# Altium PCB Guitare_Electro(2).PCBDOC
Units mm, origin at the board's own origin, x right, y up, seen from the top; angles counter-clockwise.
Board outline 299.72 x 199.9 mm, 2 copper layers (Top Layer, Bottom Layer); 99 components, 79 nets, 352 pads, 45 vias.
Unrouted connection lines stored in the file: 71.
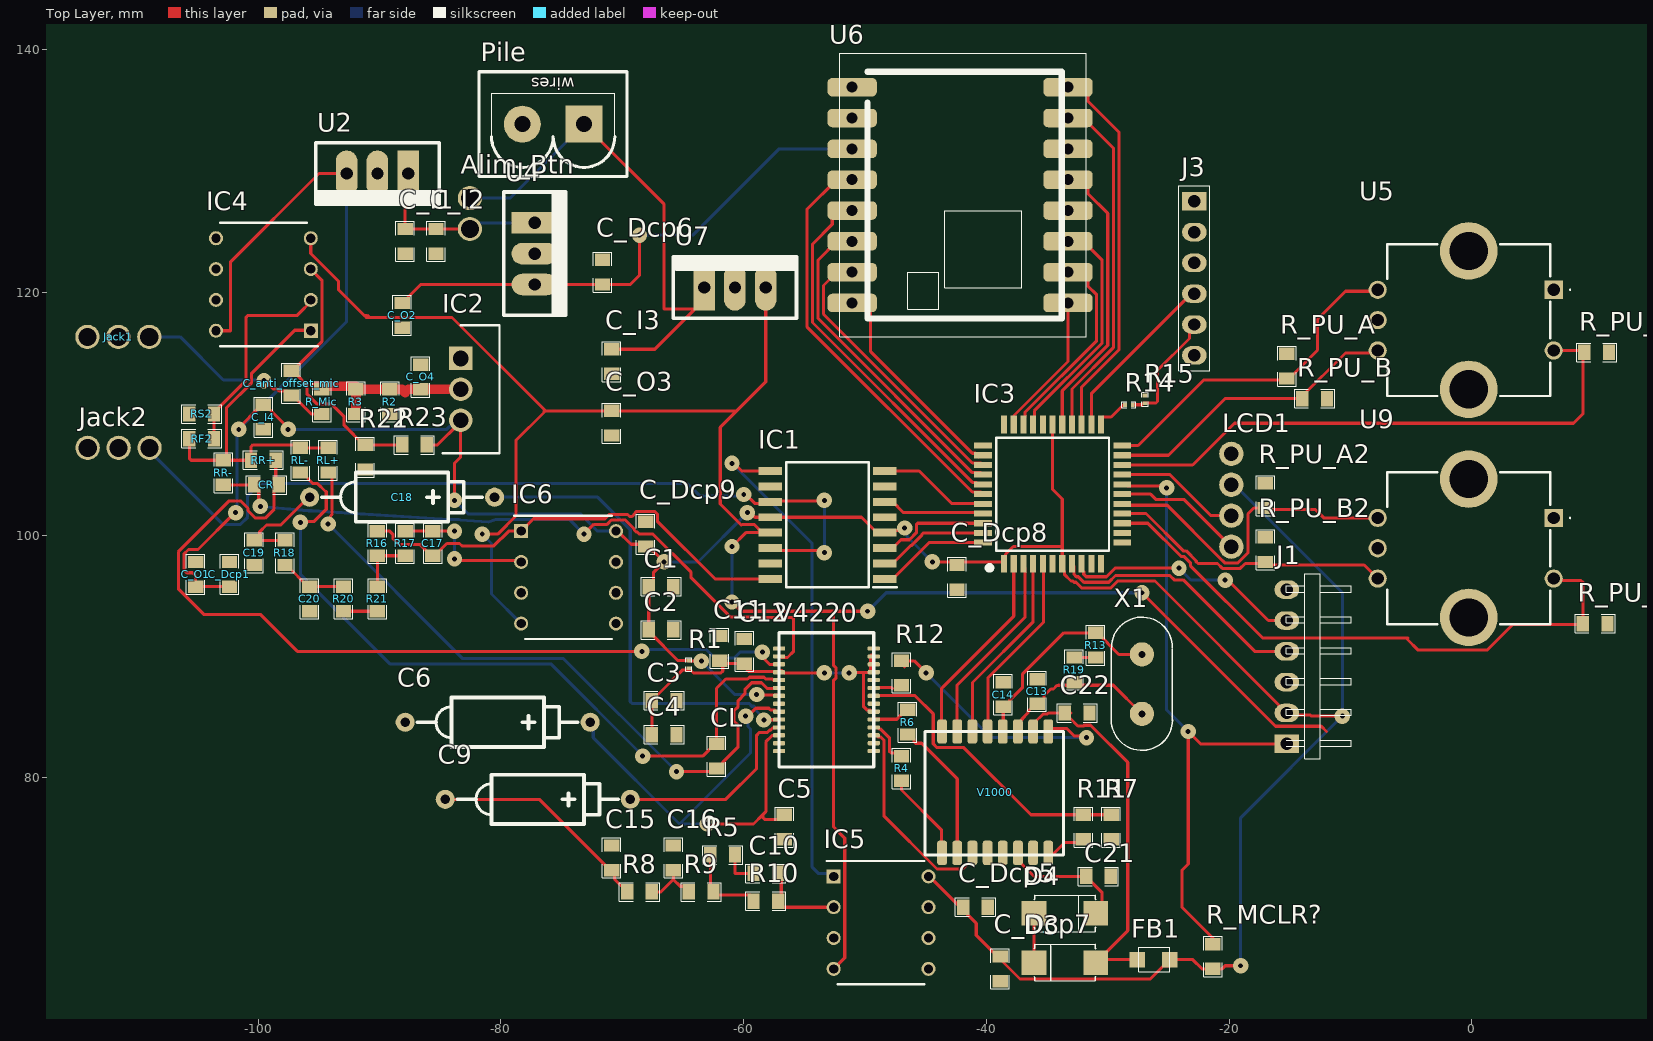
[diagram p0: Top Layer view]
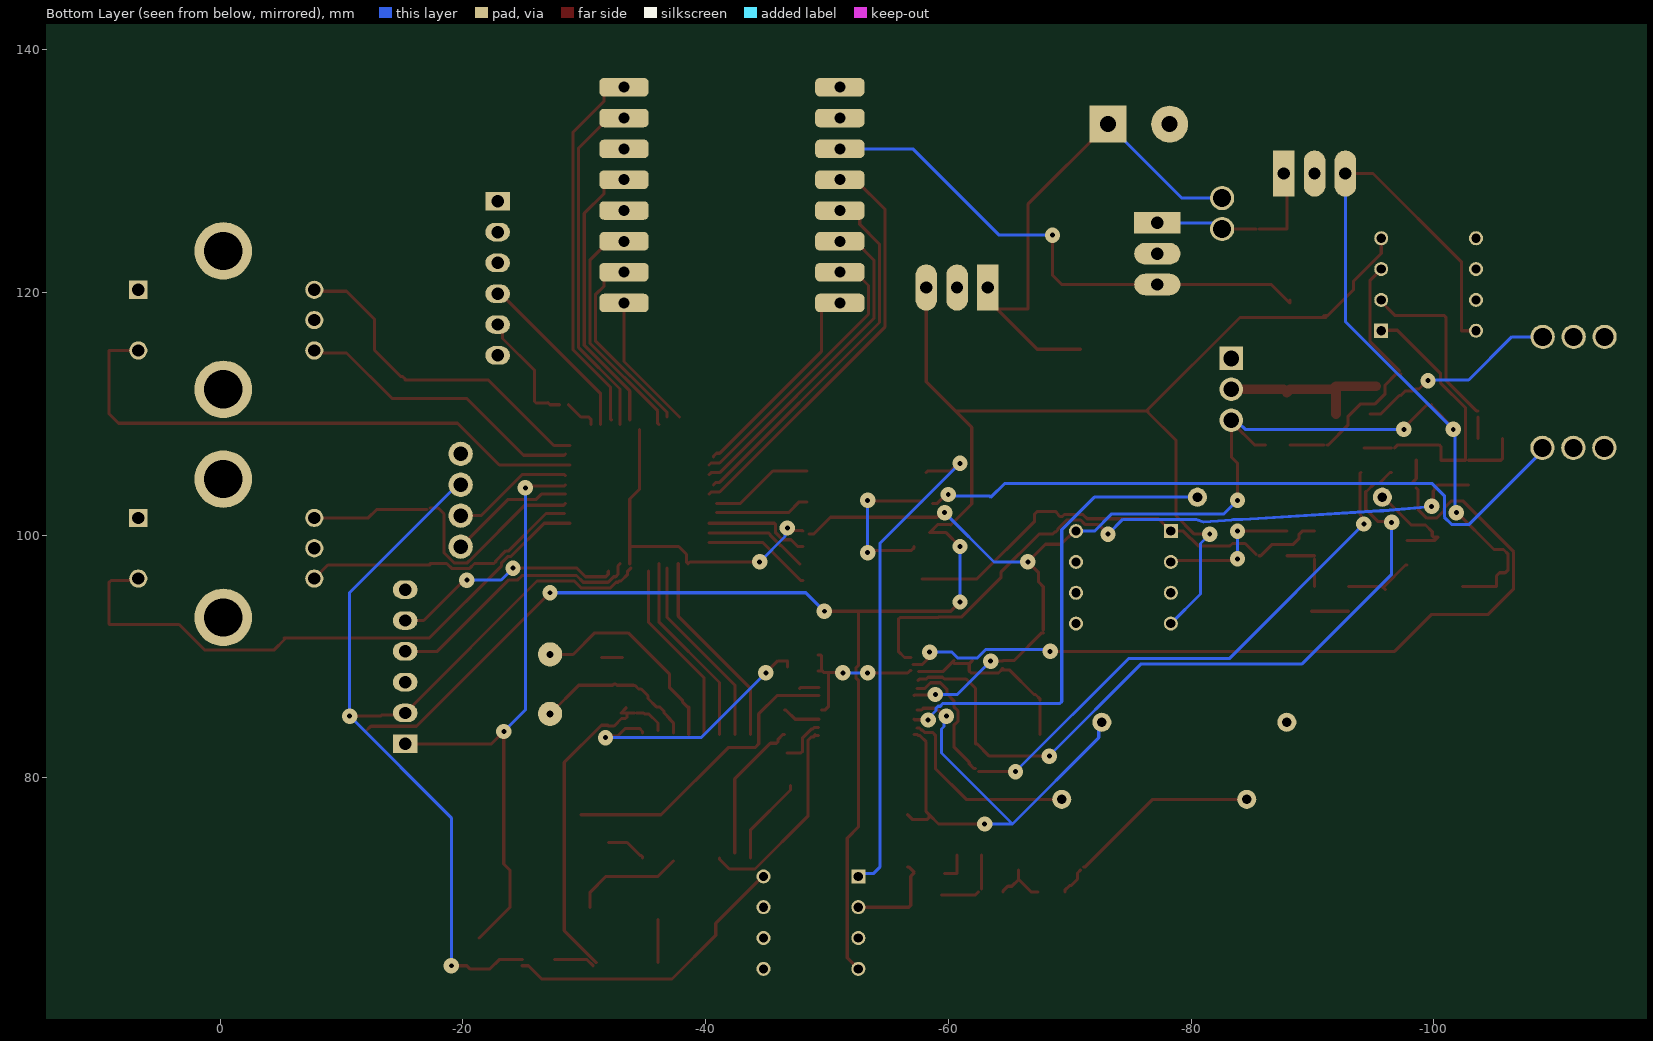
[diagram p1: Bottom Layer view, seen from below]

## Layer stack, top to bottom
Top Solder: solder mask 0.0102, Solder Resist, Dk 3.5
Top Layer: signal copper 0.0356
Dielectric1: dielectric 0.32, FR-4, Dk 4.8
Bottom Layer: signal copper 0.0356
Bottom Solder: solder mask 0.0102, Solder Resist, Dk 3.5

## Board outline
-141.655,-46.39 158.065,-46.39 158.065,153.508 -141.655,153.508

## Design rules (kind name [scope] priority, off if disabled: settings)
Clearance Clearance_7 [InNamedPolygon('Plan de masse bas')] p1: gap=1 ignorepadtopadclearanceinfootprint=FALSE except(0: Arc-Text Track-Text SMDPad-Text THPad-Text Via-Text Fill-Text Poly-Text Region-Text Text-Text)
Clearance Clearance_6 [InNamedPolygon('Plan de masse bas')] p2: gap=1 ignorepadtopadclearanceinfootprint=FALSE except(0: Arc-Text Track-Text SMDPad-Text THPad-Text Via-Text Fill-Text Poly-Text Region-Text Text-Text)
Clearance 1 [InNamedPolygon('Plan de masse bas')] p3: gap=1 ignorepadtopadclearanceinfootprint=FALSE except(0: Arc-Text Track-Text SMDPad-Text THPad-Text Via-Text Fill-Text Poly-Text Region-Text Text-Text)
Clearance Clearance_5 [InNamedPolygon('Plan de masse bas')] p4: gap=1 ignorepadtopadclearanceinfootprint=FALSE except(0: Arc-Text Track-Text SMDPad-Text THPad-Text Via-Text Fill-Text Poly-Text Region-Text Text-Text)
Clearance Clearance_4 [InNamedPolygon('Plan de masse bas')] p5: gap=0.5 ignorepadtopadclearanceinfootprint=FALSE except(0: Arc-Text Track-Text SMDPad-Text THPad-Text Via-Text Fill-Text Poly-Text Region-Text Text-Text)
Clearance Clearance_3 [InNamedPolygon('Plan de masse bas')] p6: gap=0.5 ignorepadtopadclearanceinfootprint=FALSE
Clearance .5 [InNamedPolygon('Plan de masse bas')] p7: gap=0.5 ignorepadtopadclearanceinfootprint=FALSE
Clearance Clearance_2 [InNamedPolygon('Plan de masse bas')] p8: gap=0.5 ignorepadtopadclearanceinfootprint=FALSE except(0: Arc-Text Track-Text SMDPad-Text THPad-Text Via-Text Fill-Text Poly-Text Region-Text Text-Text)
Clearance Clearance_1 [InNamedPolygon('Plan de masse bas')] p9: gap=0.5 ignorepadtopadclearanceinfootprint=FALSE except(0: Arc-Text Track-Text SMDPad-Text THPad-Text Via-Text Fill-Text Poly-Text Region-Text Text-Text)
Clearance [InNamedPolygon('Plan de masse bas')] p10: gap=0.254 ignorepadtopadclearanceinfootprint=FALSE except(0: Arc-Text Track-Text)
Clearance Clearance_bottom_polygon [OnLayer('Bottom Layer') Or OnLayer('Multi-Layer') vs OnLayer('Bottom Layer')  And  InPoly] p11: gap=0.508 ignorepadtopadclearanceinfootprint=FALSE except(0: Arc-Hole Track-Hole SMDPad-Hole THPad-Hole Via-Hole Fill-Hole Poly-Hole Region-Hole Text-Hole)
Clearance Clearance_bottom_polygon_keepout [OnLayer('Bottom Layer') Or OnLayer('Multi-Layer') Or InPoly vs OnLayer('Keepout')] p12: gap=0 ignorepadtopadclearanceinfootprint=FALSE
Clearance Clearance_top_polygon [OnLayer('Top Layer')  Or OnLayer('Multi-Layer') vs OnLayer('Top Layer') And InPoly] p13: gap=0.508 ignorepadtopadclearanceinfootprint=FALSE except(0: Arc-Hole Track-Hole SMDPad-Hole THPad-Hole Via-Hole Fill-Hole Poly-Hole Region-Hole Text-Hole)
Clearance Clearance_bottom [OnLayer('Bottom Layer') Or OnLayer('Multi-Layer') vs OnLayer('Bottom Layer')  And Not InPoly] p14: gap=0.203 ignorepadtopadclearanceinfootprint=FALSE except(0: Arc-Hole Track-Hole SMDPad-Hole THPad-Hole Via-Hole Fill-Hole Poly-Hole Region-Hole Text-Hole)
Clearance Clearance_top [OnLayer('Top Layer')  Or OnLayer('Multi-Layer') vs OnLayer('Top Layer') And Not InPoly] p15: gap=0.203 ignorepadtopadclearanceinfootprint=FALSE except(0: Arc-Hole Track-Hole SMDPad-Hole THPad-Hole Via-Hole Fill-Hole Poly-Hole Region-Hole Text-Hole)
Clearance Clearance_pad_to_pad [OnLayer('Multi-Layer') vs OnLayer('Multi-Layer')] p16: gap=0.254 ignorepadtopadclearanceinfootprint=FALSE except(0: Arc-Hole Track-Hole SMDPad-Hole THPad-Hole Via-Hole Fill-Hole Poly-Hole Region-Hole Text-Hole)
ComponentClearance ComponentClearance_bottom [OnLayer('Bottom Overlay') vs OnLayer('Bottom Overlay')] p1: gap=0 collisioncheckmode=3 verticalgap=0.254 showdistances=FALSE
ComponentClearance ComponentClearance_top [OnLayer('Top Overlay') vs OnLayer('Top Overlay')] p2: gap=0 collisioncheckmode=3 verticalgap=0.254 showdistances=FALSE
FabricationTestPointUsage TestPointUsage [All] p1: valid=0 allowmultiple=FALSE
FabricationTestpoint Testpoint [All] p1: side=3 testpointundercomponent=TRUE minsize=1.016 maxsize=2.54 preferedsize=1.524 minholesize=0 maxholesize=1.016 preferedholesize=0.813 testpointgrid=0.025 allowsidetop=TRUE allowsidebottom=TRUE usegrid=TRUE gridtolerance=0
HoleSize [All] p1: absolutevalues=TRUE maxlimit=25.4 minlimit=0.406 maxpercent=80.000 minpercent=20.000
MinimumAnnularRing [PadXSize_AllLayers = PadYSize_AllLayers] p1: minimumring=0.254
PermittedLayers [All] p1: toplayerpermitted=TRUE bottomlayerpermitted=TRUE
PolygonConnect [All] p1: connectstyle=Relief reliefconductorwidth=0.61 reliefentries=4 polygonreliefangle="90 Angle" airgapwidth=0.254
RoutingVias [All] p1: holewidth=0.406 width=1.27 viastyle="Through Hole" minholewidth=0.406 minwidth=0.914 maxholewidth=25.4 maxwidth=25.4
SMDToPlane [All] p1: distance=0
SolderMaskExpansion [All] p1: expansion=0.102 istentingtop=FALSE
SupplyNets "Schematic Supply Nets_1" [InNet('GND')] p1: voltage=0.000
ViasUnderSMD [All] p1: allowed=FALSE
Width Width_botom_top [OnLayer('Bottom Layer') or OnLayer('Top Layer')] p1: maxlimit=254 minlimit=0.254 preferedwidth=0.813
26 further rules are at their usual default settings.

## Components (designator, comment, footprint, x,y, rotation, side; value= is the part's Value field where it differs from the comment)
Alim_Btn "On/Off" On/Off -82.55,127.772 r270 top
C1 "CAP" 0805 -67.818,95.758 r0 top value=100n
C2 "CAP" 0805 -67.818,92.202 r0 top value=100n
C3 "CAP" 0805 -67.564,86.36 r0 top value=100n
C4 "CAP" 0805 -67.564,83.566 r0 top value=100n
C5 "CAP" 0805 -56.642,76.962 r270 top value=100n
C6 "CAP_POL" POLAR0.6 -72.644,84.582 r0 top value=1u
C9 "CAP_POL" POLAR0.6 -69.342,78.232 r0 top value=1u
C10 "CAP" 0805 -57.15,72.136 r180 top value=100n
C11 "CAP" 0805 -61.976,89.662 r90 top value=100n
C12 "CAP" 0805 -59.944,89.408 r90 top value=100n
C13 "CAP" 0805 -35.814,86.106 r90 top value=100n
C14 "CAP" 0805 -38.608,85.852 r90 top value=100n
C15 "CAP" 0805 -70.866,72.39 r90 top value=100n
C16 "CAP" 0805 -65.786,72.39 r90 top value=100n
C17 "CAP" 0805 -85.598,100.33 r270 top value=100n
C18 "CAP_POL" POLAR0.6 -80.518,103.124 r0 top value=1u
C19 "CAP" 0805 -100.33,99.568 r270 top value=100n
C20 "CAP" 0805 -95.758,95.758 r270 top value=100n
C21 "CAP" 0805 -31.78,71.882 r0 top value=100n
C22 "CAP" 0805 -31.496,85.344 r180 top value=100n
C_anti_offset_mic "CAP" 0805 -97.282,111.506 r90 top value=100n
C_Dcp1 "CAP" 0805 -102.362,95.758 r90 top value=100n
C_Dcp5 "CAP" 0805 -41.91,69.342 r0 top value=100n
C_Dcp6 "CAP" 0805 -71.628,120.65 r90 top value=100n
C_Dcp7 "CAP" 0805 -38.862,65.278 r270 top value=100n
C_Dcp8 "CAP" 0805 -42.418,97.536 r270 top value=100n
C_Dcp9 "CAP" 0805 -68.072,99.06 r90 top value=100n
C_I1 "CAP" 0805 -87.884,123.19 r90 top value=100n
C_I2 "CAP" 0805 -85.344,123.19 r90 top value=100n
C_I3 "CAP" 0805 -70.866,115.316 r270 top value=100n
C_I4 "CAP" 0805 -99.568,110.744 r270 top value=100n
C_O1 "CAP" 0805 -105.156,95.758 r90 top value=100n
C_O2 "CAP" 0805 -88.138,117.094 r90 top value=100n
C_O3 "CAP" 0805 -70.866,110.236 r270 top value=100n
C_O4 "CAP" 0805 -86.614,112.014 r90 top value=100n
CL "CAP" 0805 -62.23,80.772 r90 top value=100n
CR "CAP" 0805 -98.298,104.14 r180 top value=100n
D3 "comment" SMA -30.988,64.77 r180 top
D4 "comment" SMA -36.068,68.834 r0 top
FB1 "FERRITE BEAD" inductorFC -24.892,65.024 r180 top
IC1 "PGA2311U" SOIC127P1030X265-16N -53.086,100.838 r180 top
IC2 "LM350T" TO254P470X1028X1955-3P -83.312,114.554 r270 top
IC3 "PIC18F45Q24-E_PT" QFP80P1200X1200X120-44N -34.544,103.378 r90 top
IC4 "MCP6272-E_P" DIP781W56P254L950H533Q8N -99.568,120.65 r180 top
IC5 "MCP6272-E_P" DIP781W56P254L950H533Q8N -48.673,68.072 r0 top
IC6 "MCP6272-E_P" DIP781W56P254L950H533Q8N -74.422,96.52 r0 top
J1 "PIC-ICSP" PIC-ICSP -15.24,82.804 r0 top
J3 "comment" HEADER6-100-1x6 -22.86,127.508 r0 top
Jack1 "Jack 6.35" Jack -108.966,116.332 r270 top
Jack2 "Jack 6.35" Jack -108.946,107.188 r270 top
LCD1 "LCD" LCD -19.812,99.05 r180 top
Pile "comment" AMP_2 -73.152,133.858 r180 top
R1 "RES" 0201 -64.516,89.662 r270 top value=1K
R2 "RES" 0805 -89.154,112.014 r270 top value=1K
R3 "RES" 0805 -91.948,109.982 r90 top value=1K
R4 "RES" 0805 -46.99,79.756 r90 top value=1K
R5 "RES" 0805 -62.738,73.66 r0 top value=1K
R6 "RES" 0805 -46.482,83.566 r90 top value=1K
R7 "RES" 0805 -29.718,76.962 r270 top value=1K
R8 "RES" 0805 -69.596,70.612 r0 top value=1K
R9 "RES" 0805 -64.516,70.612 r0 top value=1K
R10 "RES" 0805 -59.182,69.85 r0 top value=1K
R11 "RES" 0805 -32.004,74.93 r90 top value=1K
R12 "RES" 0805 -46.99,89.662 r270 top value=1K
R13 "RES" 0805 -30.988,89.916 r90 top value=1K
R14 "RES" 0201 -27.94,110.744 r180 top value=1K
R15 "RES" 0201 -26.924,110.871 r90 top value=1K
R16 "RES" 0805 -90.17,98.298 r90 top value=1K
R17 "RES" 0805 -87.884,98.298 r90 top value=1K
R18 "RES" 0805 -97.79,99.568 r270 top value=1K
R19 "RES" 0805 -32.766,87.884 r90 top value=1K
R20 "RES" 0805 -92.964,95.758 r270 top value=1K
R21 "RES" 0805 -90.17,93.726 r90 top value=1K
R22 "RES" 0805 -91.186,107.442 r270 top value=4.7K
R23 "RES" 0805 -86.106,107.442 r180 top value=4.7K
R_MCLR? "RES" 0805 -21.336,66.294 r270 top value=1K (schematic designator R_MCLR1)
R_Mic "RES" 0805 -94.742,112.014 r270 top value=1K
R_PU_A "RES" 0805 -15.24,112.903 r90 top value=1K
R_PU_A2 "RES" 0805 -17.018,102.235 r90 top value=1K
R_PU_B "RES" 0805 -13.97,111.252 r0 top value=1K
R_PU_B2 "RES" 0805 -17.018,97.79 r90 top value=1K
R_PU_NO "RES" 0805 9.271,115.062 r0 top value=1K
R_PU_NO2 "RES" 0805 9.144,92.71 r0 top value=1K
RF2 "RES" 0805 -103.632,107.95 r180 top value=1K
RL+ "RES" 0805 -94.234,105.156 r90 top value=1K
RL- "RES" 0805 -96.52,105.156 r90 top value=1K
RR+ "RES" 0805 -98.552,106.172 r180 top value=1K
RR- "RES" 0805 -102.87,104.14 r90 top value=1K
RS2 "RES" 0805 -103.632,109.982 r180 top value=1K
U2 "78xx" TO220V -87.63,129.794 r180 top
U4 "78xx" TO220V -77.216,125.73 r270 top
U5 "PEC11R-4215F-S0024" PEC11R4215FS0024 6.746,120.214 r270 top
U6 "RF-LORA-868-SO" RF-LORA-868-DIP -51.054,136.906 r0 top
U7 "78xx" TO220V -63.256,120.401 r0 top
U9 "PEC11R-4215F-S0024" PEC11R4215FS0024 6.746,101.418 r270 top
V1000 "V1000" V1000 -34.898,83.82 r270 top
V4220 "V4220" V4220 -49.276,82.206 r180 top
X1 "10.000MHz" HC-49S -27.178,85.27 r90 top

## Footprints (in the part's own frame and the unit in brackets; to place one, negate y for a bottom-side part, rotate by r counter-clockwise, add the part's x,y. Pads: shape width x height; smd on the part's side, far side on the other; paste and mask are expansions set on the pad)
0201 [mil]
  rect 12x16 smd: 1(0,0) 2(25,0)
  silkscreen extent -10,-10 35,10
0805 [mil]
  rect 40x50 smd: 1(0,0) 2(80,0)
  silkscreen extent -25,-30 105,30
AMP_2 [mil]
  rect 120x120 hole 52: 1(0,0)
  round 120 hole 52: 2(200,0)
  silkscreen extent -140,-170 340,170
DIP781W56P254L950H533Q8N [mm]
  rect 1.158x1.158 hole 0.758: 1(-3.905,3.81)
  round 1.158 hole 0.758: 2(-3.905,1.27) 3(-3.905,-1.27) 4(-3.905,-3.81) 5(3.905,-3.81) 6(3.905,-1.27) 7(3.905,1.27) 8(3.905,3.81)
  silkscreen extent -4.48,-5.08 3.56,5.08, body extent -4.04,-4.75 4.04,4.75, height 5.33
HC-49S [mm]
  round 2 hole 0.6: 1(0,0) 2(4.9,0)
  silkscreen extent -3,-2.52 7.97,2.52
HEADER6-100-1x6 [mil]
  rect 80x60 hole 40: 1(0,0)
  oval 80x60 hole 40: 2(0,-100) 3(0,-200) 4(0,-300) 5(0,-400) 6(0,-500)
  silkscreen extent -50,-550 50,50
inductorFC [mil]
  rect 50x50 smd: 1(0,0) 2(105,0)
  silkscreen extent 0,-40 100,40
Jack [mm]
  round 2 hole 1.5 paste-2539.97 mask+0: 1(0,0) 2(0,-2.55) 3(0,-5.1)
LCD [mm]
  round 2 hole 1.2 paste-2539.97 mask+0: 1(0,0) 2(0,-2.55) 3(0,-5.1) 4(0,-7.65)
On/Off [mm]
  round 2 hole 1.5 paste-2539.97 mask+0: 1(0,0) 2(2.55,0)
PEC11R4215FS0024 [mm]
  rect 1.5x1.5 hole 1: 1(0,0)
  round 1.5 hole 1: 2(5,0) A1(0,-14.5) B1(5,-14.5) C1(2.5,-14.5)
  round 4.74 hole 3.16: MH1(-3.2,-7) MH2(8.2,-7)
  silkscreen extent -3.75,-13.7 8.75,1.4, body extent -4.4,-15.39 9.4,-0.47, height 21.48
PIC-ICSP [mil]
  rect 80x60 hole 40: 1(0,0)
  oval 80x60 hole 40: 2(0,100) 3(0,200) 4(0,300) 5(0,400) 6(0,500)
  silkscreen extent -2,-48 208,552
POLAR0.6 [mil]
  round 62 hole 31.5: 1(0,0) 2(-600,0)
  silkscreen extent -560,-80 -40,80
QFP80P1200X1200X120-44N [mm]
  rect 1.475x0.5 smd: 1(-5.738,4) 2(-5.738,3.2) 3(-5.738,2.4) 4(-5.738,1.6) 5(-5.738,0.8) 6(-5.738,0) 7(-5.738,-0.8) 8(-5.738,-1.6) 9(-5.738,-2.4) 10(-5.738,-3.2) 11(-5.738,-4) 23(5.738,-4) 24(5.738,-3.2) 25(5.738,-2.4) 26(5.738,-1.6) 27(5.738,-0.8) 28(5.738,0) 29(5.738,0.8) 30(5.738,1.6) 31(5.738,2.4) 32(5.738,3.2) 33(5.738,4)
  rect 0.5x1.475 smd: 12(-4,-5.738) 13(-3.2,-5.738) 14(-2.4,-5.738) 15(-1.6,-5.738) 16(-0.8,-5.738) 17(0,-5.738) 18(0.8,-5.738) 19(1.6,-5.738) 20(2.4,-5.738) 21(3.2,-5.738) 22(4,-5.738) 34(4,5.738) 35(3.2,5.738) 36(2.4,5.738) 37(1.6,5.738) 38(0.8,5.738) 39(0,5.738) 40(-0.8,5.738) 41(-1.6,5.738) 42(-2.4,5.738) 43(-3.2,5.738) 44(-4,5.738)
  silkscreen extent -6.27,-4.65 4.65,5.4, body extent -6,-6 6,6, height 1.2
RF-LORA-868-DIP [mil]
  rrect50% 160x60 hole 36: 1(0,0) 2(0,-100) 3(0,-200) 4(0,-300) 5(0,-400) 6(0,-500) 7(0,-600) 8(0,-700) 9(700,-700) 10(700,-600) 11(700,-500) 12(700,-400) 13(700,-300) 14(700,-200) 15(700,-100) 16(700,0)
  silkscreen extent -40,-810 760,110
SMA [mil]
  rect 80x80 smd: 1(0,0) 2(200,0)
  silkscreen extent 0,-59 200,59
SOIC127P1030X265-16N [mm]
  rect 1.95x0.65 smd: 1(-4.725,4.445) 2(-4.725,3.175) 3(-4.725,1.905) 4(-4.725,0.635) 5(-4.725,-0.635) 6(-4.725,-1.905) 7(-4.725,-3.175) 8(-4.725,-4.445) 9(4.725,-4.445) 10(4.725,-3.175) 11(4.725,-1.905) 12(4.725,-0.635) 13(4.725,0.635) 14(4.725,1.905) 15(4.725,3.175) 16(4.725,4.445)
  silkscreen extent -5.7,-5.15 3.4,5.15, body extent -5.17,-5.15 5.17,5.15, height 2.59
TO220V [mil]
  rect 70x150 hole 40: 1(0,0)
  oval 70x150 hole 40: 2(100,0) 3(200,0)
  silkscreen extent -100,-100 300,100
TO254P470X1028X1955-3P [mm]
  rect 1.935x1.935 hole 1.29: 1(0,0)
  round 1.935 hole 1.29: 2(2.54,0) 3(5.08,0)
  silkscreen extent -2.73,-1.5 7.81,3.2, body extent -2.54,-1.77 7.62,2.8, height 19.69
V1000 [mm] "Footprint du V1000"
  rrect50% 2x0.8 smd paste-2539.97 mask+0.05: 1(0,0) 2(0,-1.25) 3(0,-2.5) 4(0,-3.75) 5(0,-5) 6(0,-6.25) 7(0,-7.5) 8(0,-8.75) 9(10,0) 10(10,-1.25) 11(10,-2.5) 12(10,-3.75) 13(10,-5) 14(10,-6.25) 15(10,-7.5) 16(10,-8.75)
  silkscreen extent 0,-10.16 10.16,1.27
V4220 [mm] "Footprint du 4220"
  rrect50% 1x0.35 smd paste-2539.97 mask+0.05: 1(0,0) 2(0,-0.65) 3(0,-1.3) 4(0,-1.95) 5(0,-2.6) 6(0,-3.25) 7(0,-3.9) 8(0,-4.55) 9(0,-5.2) 10(0,-5.85) 11(0,-6.5) 12(0,-7.15) 13(0,-7.8) 14(0,-8.45) 15(7.8,-8.45) 16(7.8,-7.8) 17(7.8,-7.15) 18(7.8,-6.5) 19(7.8,-5.85) 20(7.8,-5.2) 21(7.8,-4.55) 22(7.8,-3.9) 23(7.8,-3.25) 24(7.8,-2.6) 25(7.8,-1.95) 26(7.8,-1.3) 27(7.8,-0.65) 28(7.8,0)
  silkscreen extent 0,-9.75 7.8,1.3

## Part data
C1 C2 C3 C4 C5 C10 C11 C12 C13 C14 C15 C16 C17 C19 C20 C21 C22 C_anti_offset_mic C_Dcp1 C_Dcp5 C_Dcp6 C_Dcp7 C_Dcp8 C_Dcp9 C_I1 C_I2 C_I3 C_I4 C_O1 C_O2 C_O3 C_O4 CL CR: "capacité non polarisée"
C6 C9 C18: "capacité polarisée"
D3 D4: library part DIODE, "diode usage général"
FB1: "perle ferrite"
IC1: "Integrated Circuit", Manufacturer_Name="Texas Instruments", Mouser Part Number=595-PGA2311U, Arrow Part Number=PGA2311U, Arrow Price/Stock=https://www.arrow.com/en/products/pga2311u/texas-instruments?region=nac, Datasheet Link=http://www.ti.com/lit/ds/symlink/pga2311.pdf, Height=2.65mm, Manufacturer_Part_Number=PGA2311U, Mouser Price/Stock=https://www.mouser.co.uk/ProductDetail/Texas-Instruments/PGA2311U?qs=68g8TF7PocLi9xd7ruCsyA%3D%3D
IC2: "Integrated Circuit", Manufacturer_Name="Texas Instruments", Mouser Part Number=926-LM350T, Arrow Part Number=LM350T, Arrow Price/Stock=https://www.arrow.com/en/products/lm350t/texas-instruments?region=nac, Datasheet Link=https://www.ti.com/general/docs/suppproductinfo.tsp?distId=26&gotoUrl=http%253A%252F%252Fwww.ti.com%252Flit%252Fgpn%252Flm350-n, Height=4.7mm, Manufacturer_Part_Number=LM350T, Mouser Price/Stock=https://www.mouser.co.uk/ProductDetail/Texas-Instruments/LM350T?qs=QbsRYf82W3ET2g8%2FVkuXIw%3D%3D
IC3: "Integrated Circuit", Manufacturer_Name=Microchip, Manufacturer_Part_Number=PIC18F45Q24-E/PT, Mouser Part Number=579-PIC18F45Q24EPT, Datasheet Link=https://www.mouser.it/datasheet/2/268/PIC18F26_45_46_55_56Q24_Microcontroller_Data_Sheet-3323954.pdf, Height=1.2mm, Mouser Price/Stock=https://www.mouser.co.uk/ProductDetail/Microchip-Technology/PIC18F45Q24-E-PT?qs=ST9lo4GX8V32RoCEzTJhlQ%3D%3D
IC4 IC5 IC6: "Integrated Circuit", Arrow Part Number=MCP6272-E/P, Manufacturer_Name=Microchip, Mouser Part Number=579-MCP6272-E/P, Arrow Price/Stock=https://www.arrow.com/en/products/mcp6272-ep/microchip-technology, Datasheet Link=https://datasheet.datasheetarchive.com/originals/distributors/SFDatasheet-4/sf-00090096.pdf, Height=5.334mm, Manufacturer_Part_Number=MCP6272-E/P, Mouser Price/Stock=https://www.mouser.com/Search/Refine.aspx?Keyword=579-MCP6272-E%2FP
J3: library part HEADER6
Pile: library part POWER2, "connecteur alim 2 pôles"
R1 R2 R3 R4 R5 R6 R7 R8 R9 R10 R11 R12 R13 R14 R15 R16 R17 R18 R19 R20 R21 R22 R23 R_MCLR? R_Mic R_PU_A R_PU_A2 R_PU_B R_PU_B2 R_PU_NO R_PU_NO2 RF2 RL+ RL- RR+ RR- RS2: "resistance"
U2 U4 U7: library part REG_POS, "régulateur positif fixe"
U5 U9: "Undefined or Miscellaneous", Manufacturer_Name=Bourns, Mouser Part Number=652-PEC11R-4215F-S24, Arrow Part Number=PEC11R-4215F-S0024, Arrow Price/Stock=https://www.arrow.com/en/products/pec11r-4215f-s0024/bourns?region=nac, Datasheet Link=https://www.bourns.com/docs/product-datasheets/pec11r.pdf?sfvrsn=bb617cbf_12, Height=21.5mm, Manufacturer_Part_Number=PEC11R-4215F-S0024, Mouser Price/Stock=https://www.mouser.co.uk/ProductDetail/Bourns/PEC11R-4215F-S0024?qs=Zq5ylnUbLm5lAqmKF80wzQ%3D%3D
X1: library part XTAL, "Quartz", Manufacturer="Generic Components", Class I=Oscillator, Class II="Crystal Oscillator", Published=8-Jun-2000, Publisher="Altium Limited", Revision="July-2002: Re-released for DXP Platform."

## Via types
v1: diameter 1.27, hole 0.406, Top Layer to Bottom Layer, 44 vias
v2: diameter 0.051, hole 0.036, Top Layer to Bottom Layer, 1 vias

## Nets (pads, with @x,y where several pads share a name; then routed paths per layer and width w, separated by ;. In a path a pad name is that pad's centre, name@x,y a point inside that pad or via, vN(x,y) a via of type N, cw(c..) or ccw(c..) an arc to the next point about the centre after c; other vN are vias at no path point)
_MCLR: IC3.18 J1.1 R_MCLR?.1 | length 51
  Top Layer w0.254: IC3.18@-28.448,104.14 -28.363,104.055 -25.315,104.055 v1(-25.146,103.886) ; -21.336,66.802 -23.876,69.342 -23.876,72.39 -23.368,72.898 v1(-23.368,83.82) -22.352,82.804 J1.1
  Bottom Layer w0.254: v1(-25.146,103.886) -25.146,85.598 v1(-23.368,83.82)
A_EC: IC3.22 R_PU_A.1 U5.A1 | length 27.7
  Top Layer w0.254: IC3.22 -27.496,107.378 -22.098,112.776 R_PU_A.1@-15.24,112.776 ; R_PU_A.1 -15.189,112.903 -15.037,113.055 -14.9,113.055 -12.716,115.239 -12.716,117.792 -10.414,120.094 -7.922,120.094 U5.A1@-7.874,120.142
A_EC2: IC3.16 R_PU_A2.1 U9.A1 | length 26.5
  Top Layer w0.254: IC3.16@-28.448,102.616 -28.296,102.464 -25.107,102.464 -20.763,98.12 -20.363,97.72 -19.261,97.72 -18.438,98.543 -18.438,101.755 -17.958,102.235 R_PU_A2.1@-17.272,102.235 ; R_PU_A2.1@-17.018,102.108 -12.9,102.108 -12.21,101.418 U9.A1
B_EC: IC3.21 R_PU_B.1 U5.B1 | length 24.1
  Top Layer w0.254: IC3.21@-28.448,106.68 -28.346,106.578 -24.994,106.578 -20.32,111.252 -14.224,111.252 -14.173,111.252 -10.414,115.011 -7.925,115.011 U5.B1@-7.874,115.062
B_EC2: IC3.15 R_PU_B2.1 U9.B1 | length 23.1
  Top Layer w0.254: IC3.15@-28.372,101.778 -26.848,101.778 -23.774,98.704 -23.541,98.704 -22.708,97.871 -22.708,97.808 -22.637,97.737 -22.563,97.663 -20.953,97.663 -20.552,97.263 -19.072,97.263 -18.727,97.608 ccw(c-19.304,98.806) -18.624,97.663 R_PU_B2.1@-17.272,97.663 ; R_PU_B2.1@-17.272,97.536 -8.872,97.536 U9.B1
Entrée_Micro: IC4.1 RF2.2 RL+.2 RL-.2 RR+.2 RR-.2 | length 28.2
  Top Layer w0.254: RF2.2 -105.664,106.321 -105.515,106.172 RR-.2 ; RL-.2@-96.774,107.188 -97.028,107.442 -100.435,107.442 -100.584,107.293 RR+.2 -102.616,106.172 -102.616,110.478 -100.533,112.561 -100.533,113.335 -96.988,116.88 -95.798,116.88 IC4.1@-95.758,116.84 ; RL-.2 RL+.2
GND: C1.2 C2.2 C3.2 C4.2 C5.2 C6.2 C11.2 C12.2 C13.2 C14.2 C15.2 C16.2 C19.2 C20.2 C21.2 C22.1 C_Dcp1.2 C_Dcp5.2 C_Dcp6.2 C_Dcp7.2 C_Dcp8.2 C_Dcp9.2 C_I1.1 C_I2.1 C_I3.2 C_I4.2 C_O1.2 C_O2.1 C_O3.2 C_O4.2 IC1.5 IC1.7 IC1.10 IC1.15 IC3.6 IC3.12 IC3.13 IC3.17 IC3.29 IC3.33 IC3.34 IC5.3 IC6.3 J1.3 J3.1 Jack1.2 Jack1.3 Jack2.2 Jack2.3 LCD1.1 LCD1.4 Pile.2 R2.2 R7.2 R15.2 R22.2 R_PU_A2.2 R_PU_A.2 R_PU_B2.2 R_PU_B.2 R_PU_NO2.2 R_PU_NO.2 RS2.2 U2.2 U4.2 U5.1 U5.C1 U5.MH1 U5.MH2 U6.2 U6.12 U7.2 U9.1 U9.C1 U9.MH1 U9.MH2 V1000.10 V1000.12 V1000.13 V4220.1 V4220.7 V4220.10 V4220.14 V4220.15 V4220.22 V4220.27 V4220.28 | length 10.4
  Top Layer w0.254: IC3.17@-28.448,103.378 -26.465,103.378 -26.008,102.921 -23.683,102.921 LCD1.1
Lora_DIO0: IC3.37 U6.6 | length 26.9
  Top Layer w0.254: U6.6@-51.308,124.206 -52.324,124.206 -53.873,122.657 -53.873,117.865 -41.156,105.148 -40.452,105.148 IC3.37
Lora_DIO1: IC3.36 U6.7 | length 23.5
  Top Layer w0.254: U6.7 -52.324,121.666 -53.416,120.574 -53.416,118.208 -41.156,105.948 -40.452,105.948 IC3.36
Lora_DIO2: IC3.35 U6.8 | length 17.7
  Top Layer w0.254: U6.8 -50.146,119.126 -49.53,118.51 -49.53,115.122 -41.156,106.748 -40.893,106.748 -40.64,106.495 IC3.35@-40.64,106.426
Lora_DIO3: IC3.32 U6.9 | length 11.3
  Top Layer w0.254: IC3.32@-37.846,109.728 -33.274,114.3 U6.9
Lora_DIO4: IC3.31 U6.10 | length 16
  Top Layer w0.254: IC3.31@-36.83,109.728 -36.83,110.097 -30.912,116.016 -30.912,119.802 -31.633,120.523 -31.633,121.05 -32.249,121.666 U6.10
Lora_DIO5: IC3.30 U6.11 | length 18.3
  Top Layer w0.254: IC3.30 -36.046,109.214 -36.046,110.235 -30.455,115.826 -30.455,122.657 -32.004,124.206 U6.11@-32.258,124.206
Micro_EffetL: C9.1 V4220.25 | length 16
  Top Layer w0.254: C9.1 -61.468,78.232 -58.928,80.772 -58.928,83.519 -58.698,83.749 -58.033,83.749 -57.851,83.93 -57.802,83.93 -57.625,84.108 -57.419,84.108 V4220.25@-57.404,84.123
Micro_EffetR: C18.1 V4220.24 | length 39.5
  Top Layer w0.254: v1(-58.328,84.769) -58.31,84.788 -57.216,84.788 V4220.24@-57.15,84.854
  Bottom Layer w0.254: C18.1 -72.025,103.124 -69.342,100.441 -69.342,86.284 -69.193,86.135 -59.56,86.135 -59.328,85.903 -59.151,85.903 -58.981,85.733 -58.981,85.553 -58.328,84.901 v1(-58.328,84.769)
Micro_OutputL: C10.2 IC1.9 IC5.1 R5.2 | length 43.8
  Top Layer w0.254: v1(-60.96,105.918) -60.793,105.918 -60.158,105.283 -58.293,105.283 IC1.9@-58.166,105.156 ; R5.2 -60.706,72.136 C10.2@-59.69,72.136
  Bottom Layer w0.254: v1(-60.96,105.918) -54.356,99.314 -54.356,72.644 -53.848,72.136 -52.832,72.136 IC5.1
Micro_OutputR: C17.2 IC1.16 IC6.1 R16.2 | length 37.6
  Top Layer w0.254: R16.2 -89.154,100.33 -88.905,100.081 -88.905,99.741 -88.374,99.21 -86.637,99.21 -85.725,98.298 C17.2 ; C17.2@-85.344,98.425 -84.455,99.314 -83.407,99.314 -83.204,99.111 -80.583,99.111 -79.363,100.33 IC6.1 -77.311,101.346 -71.433,101.346 -71.083,101.696 -69.554,101.696 -69.396,101.539 -69.186,101.539 -69.037,101.688 -69.037,101.737 -68.844,101.93 -67.3,101.93 -67.107,101.737 -67.107,101.143 -62.357,96.393 IC1.16
NetAlim_Btn_1: Alim_Btn.1 C_I3.1 Pile.1 U7.1 | length 42.2
  Top Layer w0.254: Pile.1 -66.548,127.254 -66.548,118.618 -66.543,118.623 U7.1@-64.018,118.623 ; C_I3.1 -67.325,115.316 U7.1@-64.018,118.623 ; U7.1@-63.246,119.888 -63.246,119.395 U7.1@-64.018,118.623
  Bottom Layer w0.254: Alim_Btn.1@-82.55,127.762 -79.248,127.762 Pile.1
  other v2: -82.55,127.772
NetAlim_Btn_2: Alim_Btn.2 C_I1.2 C_I2.2 U2.1 U4.1 | length 15.6
  Top Layer w0.254: U2.1 -87.884,129.54 C_I1.2 C_I2.2@-85.598,125.222 ; C_I2.2 -85.334,125.212 -82.56,125.212 Alim_Btn.2
  Bottom Layer w0.254: Alim_Btn.2@-82.804,125.222 -82.296,125.73 U4.1
NetC5_1: C5.1 C6.1 V4220.23 V4220.26 | length 42.3
  Top Layer w0.254: v1(-62.992,76.2) -59.182,76.2 -58.42,76.962 ; v1(-59.837,85.083) -59.641,85.083 -58.99,85.734 -57.929,85.734 -57.792,85.598 V4220.23@-57.404,85.598 ; V4220.26@-57.15,83.57 -57.449,83.57 -57.546,83.473 -57.662,83.473 -58.166,82.969 -58.166,77.216 -58.42,76.962 ; C5.1 -57.023,76.581 -58.271,76.581 -58.42,76.73 -58.42,76.962
  Bottom Layer w0.254: C6.1@-72.39,84.582 -72.391,84.581 -72.391,83.972 -72.39,83.971 -72.39,83.312 -65.278,76.2 ; v1(-62.992,76.2) -65.278,76.2 ; v1(-59.837,85.083) -59.643,84.888 -59.643,84.233 -59.436,84.027 -59.436,82.042 -65.278,76.2
NetC9_2: C9.2 C15.1 R8.1 | length 18.2
  Top Layer w0.254: C9.2 -76.835,78.232 -71.247,72.644 C15.1@-71.12,72.644 ; C15.1 -70.634,72.158 -70.634,71.65 -70.104,71.12 -69.977,71.12 -69.596,70.739 R8.1
NetC10_1: C10.1 IC5.2 R10.2 | length 7.8
  Top Layer w0.254: C10.1 -56.896,71.882 -56.896,69.491 -56.747,69.342 IC5.2 ; C10.1@-57.15,72.263 -56.769,72.644 -56.642,72.644
NetC13_1: C13.1 R19.1 V1000.3 X1.1 | length 13.6
  Top Layer w0.254: V1000.3@-37.338,83.681 -37.338,84.534 -37.045,84.827 -37.045,84.875 -36.576,85.344 -36.576,85.471 -36.195,85.852 -35.941,85.852 -35.255,86.538 -35.255,86.76 -34.69,87.325 -34.468,87.325 -34.188,87.605 -34.061,87.605 -34.036,87.63 -32.69,87.63 -32.588,87.732 -32.436,87.732 -32.334,87.63 -29.538,87.63 -27.252,85.344 X1.1@-27.178,85.344
NetC14_1: C14.1 R13.2 V1000.4 X1.2 | length 17.7
  Top Layer w0.254: V1000.4@-38.608,83.566 C14.1 -38.481,85.852 -38.1,86.233 -38.1,86.36 -37.033,87.427 -37.033,88.529 -33.614,91.948 R13.2 -30.861,91.948 -29.083,90.17 X1.2
NetC16_1: C16.1 R8.2 R9.1 | length 4.5
  Top Layer w0.254: R8.2@-67.383,70.612 -66.802,70.612 -65.786,71.628 ; C16.1 -65.786,71.628 ; R9.1 -64.516,70.691 -64.897,71.072 -65.23,71.072 -65.786,71.628
NetC17_1: C17.1 IC6.2 R17.2 | length 12.4
  Top Layer w0.254: R17.2 v1(-83.82,100.33) v1@-83.381,100.33 ; v1(-83.82,98.044) -83.693,97.917 -78.454,97.917 IC6.2
  Bottom Layer w0.254: v1(-83.82,98.044) v1(-83.82,100.33)
NetC18_2: C18.2 C19.1 R18.1 | length 9
  Top Layer w0.254: R18.1 -100.076,99.568 -100.33,99.822 -99.997,99.822 -99.87,99.949 -99.87,100.282 -99.314,100.838 -98.139,100.838 -95.853,103.124 C18.2@-95.504,103.124
NetC20_1: C20.1 R18.2 R20.1 | length 5.9
  Top Layer w0.254: R18.2 -97.663,97.536 -95.885,95.758 C20.1 ; C20.1@-96.012,95.504 C20.1 ; R20.1 C20.1
NetC21_1: C21.1 D4.2 V1000.11 | length 9.2
  Top Layer w0.254: V1000.11@-37.338,73.152 -36.068,71.882 C21.1 ; C21.1@-31.75,71.882 -31.75,71.852 -30.48,70.582 D4.2@-30.48,69.342
NetC22_2: C22.2 D3.1 FB1.2 V1000.2 | length 32.4
  Top Layer w0.254: V1000.2@-36.068,83.914 -36.068,84.514 -35.314,85.268 -34.971,85.268 -34.895,85.344 -34.29,85.344 ; -34.151,85.344 -34.036,85.344 -33.752,85.344 C22.2 ; C22.2@-33.45,85.774 -33.02,85.344 -33.274,85.344 C22.2 ; -31.941,84.277 -32.461,84.277 -33.068,84.884 -33.401,84.884 -33.528,85.011 C22.2 ; -31.941,84.336 -31.409,84.336 ; -31.35,84.277 -28.346,81.273 -28.346,67.412 D3.1 ; D3.1@-30.734,64.516 -30.226,65.024 FB1.2
NetC_anti_offset_mic_1: C_anti_offset_mic.1 Jack1.1 R_Mic.2 | length 16.7
  Top Layer w0.254: v1(-99.521,112.728) -99.462,112.728 -98.773,112.039 -98.45,112.039 -98.298,111.887 -97.663,111.887 C_anti_offset_mic.1 ; C_anti_offset_mic.1@-97.155,111.506 -95.631,109.982 R_Mic.2
  Bottom Layer w0.254: Jack1.1 -106.426,116.332 -102.87,112.776 -99.568,112.776 v1(-99.521,112.728)
NetC_anti_offset_mic_2: C_anti_offset_mic.2 IC4.3 R22.1 R23.2 | length 22
  Top Layer w0.254: C_anti_offset_mic.2@-97.282,113.284 -96.901,113.284 -95.987,112.37 -95.987,111.649 -95.158,110.82 -93.97,110.82 -92.913,109.763 -92.913,109.042 -91.313,107.442 R22.1 ; C_anti_offset_mic.2@-97.155,113.538 -94.754,115.939 -94.754,121.011 IC4.3 IC4.3@-95.758,121.92 ; R22.1@-90.932,107.442 R23.2
NetCL_1: CL.1 RL+.1 V4220.20 | length 55.3
  Top Layer w0.254: v1(-94.234,100.914) -94.04,101.109 -94.04,101.58 -93.929,101.69 -93.929,105.105 RL+.1@-93.98,105.156 ; v1(-65.532,80.518) CL.1@-62.484,80.518 ; CL.1 -62.103,80.772 -61.722,81.153 -61.722,81.28 -60.452,82.55 -60.452,84.333 -60.802,84.683 -60.802,85.483 -60.748,85.537 -60.748,85.57 -60.452,85.866 -60.452,86.36 -59.893,86.919 -59.893,87.268 -59.328,87.833 -58.528,87.833 -58.071,87.376 V4220.20@-57.404,87.376
  Bottom Layer w0.254: v1(-94.234,100.914) -83.141,89.821 -74.835,89.821 v1(-65.532,80.518)
NetCL_2: CL.2 RL-.1 V4220.19 | length 61.7
  Top Layer w0.254: v1(-96.52,101.045) -96.428,101.136 -95.377,101.136 -94.386,102.127 -94.386,103.587 ; RL-.1 -96.393,105.156 -95.479,104.242 -95.098,104.242 -94.488,103.632 ; v1(-68.326,81.788) -63.373,81.788 -62.357,82.804 CL.2 -62.23,87.376 -61.468,88.138 -59.67,88.138 -59.517,88.29 -58.339,88.29 -58.186,88.138 -57.609,88.138 V4220.19@-57.512,88.041
  Bottom Layer w0.254: v1(-96.52,101.045) -96.52,96.774 -96.446,96.7 -89.11,89.364 -75.845,89.364 -68.326,81.845 v1(-68.326,81.788)
NetCR_1: CR.1 RR+.1 V4220.17 | length 70.2
  Top Layer w0.254: CR.1@-98.552,103.886 -98.679,103.759 -98.679,102.14 -99.422,101.397 -100.222,101.397 -100.838,102.013 -100.838,102.203 -101.454,102.819 -102.383,102.819 -106.578,98.624 -106.578,95.57 -104.48,93.472 -99.822,93.472 -96.774,90.424 v1(-68.377,90.424) ; RR+.1 -98.552,104.648 CR.1@-98.298,104.394 ; v1(-58.457,90.353) -58.263,90.159 -58.263,89.759 -57.86,89.356 V4220.17
  Bottom Layer w0.254: v1(-68.377,90.424) -68.224,90.576 -63.075,90.576 -62.364,89.865 -60.792,89.865 -60.304,90.353 v1(-58.457,90.353)
NetCR_2: CR.2 RR-.1 V4220.16 | length 57.2
  Top Layer w0.254: RR-.1 CR.2 CR.2@-100.076,103.886 ; CR.2@-100.203,103.886 -99.949,103.632 -99.949,102.489 v1(-99.822,102.362) ; v1(-73.152,100.076) -72.339,100.889 -71.244,100.889 -70.894,101.239 -69.743,101.239 -69.037,100.533 -69.037,100.447 -68.844,100.254 -68.758,100.254 -68.58,100.076 -67.469,100.076 -64.325,96.932 -64.325,96.488 -61.106,93.269 -59.233,93.269 -59.182,93.218 -56.029,93.218 -55.88,93.069 -55.88,90.424 -56.388,89.916 V4220.16@-56.896,89.916
  Bottom Layer w0.254: v1(-99.822,102.362) -95.857,102.011 ccw(c-95.758,103.124) -95.739,102.007 -95.583,102.009 ccw(c-95.504,103.124) -95.574,102.009 -84.24,101.296 -84.238,101.296 ccw(c-84.224,101.549) -84.22,101.295 -83.523,101.295 cw(c-83.523,101.041) -83.445,101.283 -83.332,101.246 -82.792,101.205 -81.019,101.093 -80.41,101.295 -74.371,101.295 v1(-73.152,100.076)
NetD3_2: D3.2 D4.1 | length 3.6
  Top Layer w0.254: D3.2 D4.1@-36.068,68.326
NetIC1_11: IC1.11 IC1.14 Jack2.1 | length 69.4
  Top Layer w0.254: v1(-59.989,103.348) -59.819,103.348 -59.087,102.616 IC1.11@-58.674,102.616 ; IC1.11 -57.747,102.807 -53.404,102.807 v1(-53.34,102.87) ; IC1.14@-57.15,99.06 -57.15,98.93 -56.963,98.743 -53.53,98.743 v1(-53.34,98.552)
  Bottom Layer w0.254: Jack2.1@-109.22,107.188 -102.921,100.889 -101.454,100.889 -100.866,101.477 -100.866,103.247 -99.871,104.242 -64.618,104.242 -63.5,103.124 -63.388,103.236 -60.101,103.236 v1(-59.989,103.348) ; v1(-53.34,98.552) v1(-53.34,102.87)
NetIC3_19: IC3.19 LCD1.2 | length 10.1
  Top Layer w0.254: IC3.19@-28.448,104.902 -28.372,104.978 -24.873,104.978 -21.495,101.6 LCD1.2
NetIC3_23: IC3.23 R14.2 | length 2.8
  Top Layer w0.254: IC3.23 -30.544,109.554 -30.371,109.727 -29.719,109.727 R14.2@-28.702,110.744
NetIC4_2: IC4.2 RF2.1 RS2.1 | length 16.8
  Top Layer w0.254: RF2.1 RS2.1@-103.632,109.728 ; RS2.1@-103.632,110.236 -103.505,110.236 -100.99,112.751 -100.99,117.961 -100.842,118.11 -96.774,118.11 IC4.2@-95.475,119.409
NetR4_2: R4.2 V4220.4 | length 4.1
  Top Layer w0.254: V4220.4 -48.951,84.156 -48.806,84.011 -48.69,84.011 -47.989,83.309 -47.989,82.191 -47.84,82.042 R4.2@-46.695,82.042
NetR5_1: R5.1 R9.2 R10.1 | length 5.9
  Top Layer w0.254: R9.2@-62.738,70.866 R5.1 ; R9.2 -62.23,70.358 R10.1@-59.436,70.358
NetR6_2: R6.2 V4220.5 | length 3.3
  Top Layer w0.254: V4220.5@-49.35,84.828 -47.874,84.828 ; -47.744,84.828 -47.874,84.828 ; R6.2 -46.609,85.598 -47.379,84.828 -47.874,84.828
NetR7_1: R7.1 R11.2 V4220.8 | length 25.1
  Top Layer w0.254: V4220.8@-49.35,86.778 -45.884,86.778 -44.378,85.272 -44.378,82.8 -44.068,82.49 -41.85,82.49 -36.322,76.962 -31.75,76.962 R7.1
NetR12_2: R12.2 V4220.9 | length 1.6
  Top Layer w0.254: V4220.9@-49.35,87.428 -47.804,87.428 -47.752,87.376
NetR13_1: R13.1 R19.2 | length 1.7
  Top Layer w0.254: R19.2@-33.13,89.916 R13.1@-31.43,89.916
NetR16_1: R16.1 R17.1 R21.2 | length 4.6
  Top Layer w0.254: R21.2 R16.1@-90.17,98.044 ; R16.1 R17.1
NetR20_2: R20.2 R21.1 | length 3
  Top Layer w0.254: R20.2 R21.1@-89.916,93.726
NO_EC: IC3.20 R_PU_NO.1 U5.2 | length 47.2
  Top Layer w0.254: IC3.20 -23,105.778 -19.558,109.22 8.382,109.22 9.144,109.982 9.144,115.189 9.132,115.201 6.997,115.201 U5.2@6.858,115.062
NO_EC2: IC3.14 R_PU_NO2.1 U9.2 | length 49.3
  Top Layer w0.254: IC3.14 -26.695,100.978 -23.964,98.247 -23.73,98.247 -23.165,97.682 -23.165,97.448 -17.233,91.516 -5.252,91.516 ; -5.334,91.44 -4.412,90.518 1.257,90.518 3.376,92.636 9.119,92.636 9.144,92.662 R_PU_NO2.1 9.144,96.117 8.995,96.266 6.898,96.266 U9.2
P0: IC3.5 V1000.5 | length 15.4
  Top Layer w0.254: V1000.5@-39.878,83.566 -39.878,88.224 -35.306,92.796 IC3.5@-35.306,97.028
P1: IC3.4 V1000.6 | length 16.1
  Top Layer w0.254: V1000.6@-41.148,83.566 -41.148,87.853 -36.144,92.857 IC3.4
P2: IC3.3 V1000.7 | length 16
  Top Layer w0.254: V1000.7@-42.418,83.566 -42.418,87.63 -36.83,93.218 IC3.3@-36.83,97.282
P3: IC3.2 V1000.8 | length 16.5
  Top Layer w0.254: V1000.8@-43.688,83.566 -43.688,87.383 -37.744,93.327 IC3.2
PGA_1: IC1.1 IC3.44 | length 9
  Top Layer w0.254: IC1.1@-48.006,96.266 -47.838,96.266 -44.726,99.378 IC3.44
PGA_2: IC1.2 IC3.43 | length 8.6
  Top Layer w0.254: IC1.2@-47.752,97.622 -46.212,99.162 -46.147,99.162 -45.314,99.995 -45.314,100.06 -45.196,100.178 IC3.43
PGA_3: IC1.3 IC3.42 | length 8.9
  Top Layer w0.254: IC1.3@-48.006,99.06 -47.584,99.06 -47.025,99.619 -46.336,99.619 -45.771,100.184 -45.771,100.873 -45.666,100.978 IC3.42
PGA_4: IC1.6 IC3.41 | length 7.8
  Top Layer w0.254: IC1.6 -47.711,102.743 -46.822,101.854 IC3.41@-40.894,101.854
PGA_5: IC1.8 IC3.40 | length 8.6
  Top Layer w0.254: IC1.8 -45.537,105.283 -42.87,102.616 IC3.40@-40.894,102.616
PGC: IC3.9 J1.5 | length 19.2
  Top Layer w0.254: IC3.9@-32.004,97.028 -31.974,96.998 -31.974,96.766 -31.781,96.572 -30.107,96.572 -29.398,97.282 v1(-24.13,97.282) ; v1(-20.32,96.297) -20.097,96.297 -16.764,92.964 J1.5
  Bottom Layer w0.254: v1(-24.13,97.282) -23.145,96.297 v1(-20.32,96.297)
PGD: IC3.8 J1.4 | length 21.6
  Top Layer w0.254: IC3.8 -32.774,97.47 -32.774,96.766 -32.581,96.572 -32.427,96.572 -31.97,96.115 -29.918,96.115 -29.361,96.672 -24.885,96.672 -24.53,96.317 -23.788,96.317 -17.895,90.424 J1.4
Rx: IC3.24 J3.4 | length 14.5
  Top Layer w0.254: IC3.24 -31.344,111.658 J3.4@-22.86,120.142
RX_SW: IC3.39 U6.4 | length 34.6
  Top Layer w0.254: U6.4 -52.324,129.286 -54.788,126.822 -54.788,117.179 -41.156,103.548 -40.452,103.548 IC3.39
Tx: J3.5 R14.1 R15.1 | length 9.5
  Top Layer w0.254: R14.1 -27.178,110.744 R15.1@-27.013,110.909 ; R15.1 -26.899,110.896 -26.01,110.896 ; -25.908,110.998 -25.908,113.559 -23.262,116.205 -23.262,116.946 J3.5
TX_SW: IC3.38 U6.5 | length 30.4
  Top Layer w0.254: U6.5 -52.079,126.746 -52.695,126.13 -52.695,125.603 -54.331,123.967 -54.331,117.522 -41.156,104.348 -40.848,104.348 IC3.38@-40.64,104.14
V1000_DIN: R11.1 V1000.9 | length 3.4
  Top Layer w0.254: V1000.9@-34.798,73.406 -34.798,73.521 -34.715,73.604 -34.6,73.604 -33.528,74.676 R11.1@-32.004,74.676
V1000_DOUT: R12.1 V1000.1 | length 21.7
  Top Layer w0.254: -46.757,89.134 -46.757,89.641 -45.953,89.641 v1(-44.958,88.646) ; V1000.1@-34.798,83.681 -34.798,83.827 -34.551,84.074 -33.39,84.074 -32.766,83.45 -31.888,83.45 v1(-31.75,83.312)
  Bottom Layer w0.254: v1(-44.958,88.646) -39.624,83.312 v1(-31.75,83.312)
V1000_LRCLK: R4.1 V1000.16 | length 7.3
  Top Layer w0.254: R4.1@-46.99,79.37 -46.99,78.994 -43.688,75.692 V1000.16@-43.688,73.406
V1000_MCLK: V1000.14 V4220.3 | length 17
  Top Layer w0.254: V4220.3 -48.977,83.506 -48.929,83.458 -48.929,83.361 -48.69,83.361 -48.446,83.117 -48.446,76.868 -44.068,72.49 -41.949,72.49 -41.148,73.291 V1000.14@-41.148,73.406 ; V4220.3@-49.022,83.566 V4220.3@-48.929,83.473
V1000_SCLK: R6.1 V1000.15 | length 11.8
  Top Layer w0.254: R6.1 -46.355,83.566 -45.974,83.185 -45.974,83.001 -45.825,82.852 -45.335,82.852 -42.398,79.915 V1000.15
VA_4220: C1.1 C2.1 C_Dcp1.1 C_Dcp5.1 C_Dcp7.1 C_Dcp8.1 C_Dcp9.1 C_I4.1 C_O1.1 FB1.1 IC1.4 IC1.12 IC2.3 IC3.1 IC3.7 IC3.28 IC4.8 IC5.8 IC6.8 J1.2 LCD1.3 R1.1 R23.1 R_MCLR?.2 U2.3 V4220.21 | length 286.2
  Top Layer w0.254: IC4.8@-103.378,116.84 -102.29,116.84 -102.29,122.495 -94.991,129.794 U2.3 ; C_Dcp1.1 C_O1.1 -105.156,96.647 -105.405,96.896 -105.872,96.896 -106.121,97.145 -106.121,98.435 -105.739,98.817 -104.954,98.817 v1@-101.879,101.891 ; v1@-101.663,108.776 -99.822,110.617 C_I4.1@-99.822,110.744 ; C_I4.1 -99.441,110.744 -97.536,108.839 v1(-97.536,108.712) ; R23.1 -85.217,107.442 -83.439,109.22 -83.312,109.22 -83.312,106.433 -83.82,105.925 v1(-83.82,102.87) ; IC6.8@-70.612,100.33 -70.358,100.33 -69.278,99.251 -68.008,99.251 v1(-66.548,97.79) -67.437,96.901 -67.437,96.139 C1.1 C2.1 ; C2.1@-67.818,91.948 -67.691,91.948 -65.405,89.662 R1.1 -64.491,89.637 -64.389,89.637 -64.364,89.611 v1(-63.475,89.611) ; v1(-59.69,101.854) -59.453,101.854 -59.072,101.473 IC1.12 -50.281,101.473 -48.884,100.076 IC1.4@-48.514,100.076 ; v1(-58.928,86.868) -58.883,86.823 -57.195,86.823 V4220.21@-57.15,86.778 ; IC1.4@-48.006,100.33 -47.942,100.394 -46.926,100.394 v1(-46.736,100.584) ; IC5.8@-44.792,71.97 -40.831,68.009 -40.831,67.034 -37.221,63.424 -26.492,63.424 -25.4,64.516 FB1.1@-24.892,64.516 ; v1(-44.45,97.79) -38.694,97.79 IC3.1 -38.421,97.763 -38.421,98.417 -37.778,99.06 -33.782,99.06 ; IC3.28@-34.544,108.712 -34.544,103.778 -33.744,102.978 IC3.7 ; IC3.7@-33.827,97.282 -33.574,97.029 -33.574,96.766 -33.024,96.215 -32.87,96.215 -32.77,96.115 -32.617,96.115 -32.16,95.658 -29.728,95.658 -29.171,96.215 -26.111,96.215 J1.2 -15.084,85.188 -13.341,85.188 -13.243,85.09 v1(-10.668,85.09) ; FB1.1 -22.987,65.024 -22.225,64.262 R_MCLR?.2 -20.574,64.262 -20.32,64.516 v1(-19.05,64.516)
  Bottom Layer w0.254: v1(-101.854,101.854) -101.727,101.981 -101.727,108.585 v1(-101.6,108.712) -92.71,117.602 U2.3 ; v1(-97.536,108.712) -84.457,108.712 -83.949,109.22 IC2.3@-83.312,109.22 ; v1(-83.82,102.87) -82.702,101.752 -73.463,101.752 -72.041,100.33 IC6.8 ; v1(-66.548,97.79) -63.754,97.79 v1(-59.69,101.854) ; v1(-63.475,89.611) -60.731,86.868 v1(-58.928,86.868) ; v1(-46.736,100.584) -46.542,100.39 -46.542,99.882 v1(-44.45,97.79) ; LCD1.3@-19.304,103.906 -10.668,95.27 v1(-10.668,85.09) -19.05,76.708 v1(-19.05,64.516)
VD_4220: C3.1 C4.1 C11.1 C12.1 R1.2 V4220.6 V4220.11 V4220.12 V4220.13 V4220.18 | length 28.1
  Top Layer w0.254: C4.1 C3.1@-67.564,86.106 ; C3.1 -67.564,86.487 -67.183,86.868 -67.056,86.868 -65.024,88.9 R1.2@-64.516,88.9 ; R1.2 -64.465,89.027 -64.44,89.002 -64.44,88.951 -64.135,88.646 -61.871,88.646 -61.722,88.795 C11.1@-61.722,89.408 ; C11.1 C11.1@-61.722,89.408 ; C12.1@-60.452,89.408 C11.1@-61.722,89.408 ; C12.1@-60.452,89.662 -59.538,88.748 V4220.18@-57.525,88.748 ; V4220.18@-56.896,88.851 -56.847,88.851 -56.642,88.646 v1(-53.34,88.646) ; v1(-51.308,88.646) -51.281,88.673 -50.038,88.673 ; V4220.6@-49.53,85.598 -49.631,85.598 -49.634,85.601 -49.862,85.601 -50.106,85.845 -50.106,88.605 -50.038,88.673 ; -49.53,88.9 -49.53,90.07 -49.482,90.118 V4220.13@-49.276,90.118 ; V4220.11@-49.276,88.818 -49.601,88.818 -49.746,88.673 -50.038,88.673
  Bottom Layer w0.254: v1(-53.34,88.646) v1(-51.308,88.646)
Vdd_2V: C_O4.1 IC2.1 IC2.2 R2.1 R3.1 R3.2 R_Mic.1 | length 13.7
  Top Layer w0.813: R_Mic.1@-95.25,112.268 -91.948,112.268 R3.2@-91.821,112.141 ; R3.1 R3.2 ; R3.2@-91.694,112.014 R2.1 -88.138,112.014 -87.884,111.76 ; -87.63,112.014 C_O4.1 IC2.2
Vdd_3.3V: C_Dcp6.1 C_O2.2 U4.3 U6.3 | length 44.5
  Top Layer w0.254: C_O2.2@-88.138,119.38 C_O2.2 -86.614,120.65 U4.3 -69.342,120.65 -68.58,121.412 v1(-68.58,124.714)
  Bottom Layer w0.254: v1(-68.58,124.714) -64.178,124.714 -57.066,131.826 U6.3
Vdd_-5V: C_O3.1 IC1.13 IC4.4 IC5.4 IC6.4 U7.3 | length 180.5
  Top Layer w0.254: IC4.4 -95.663,123.206 -93.381,120.924 -93.381,120.219 -91.272,118.11 -91.017,118.11 -90.855,117.948 ; -91.094,117.932 -84.023,117.932 -76.327,110.236 -76.2,110.236 C_O3.1 -60.565,110.236 ; v1(-81.534,100.076) -80.264,100.076 -78.77,101.57 -78.77,107.793 -76.454,110.109 -76.454,110.236 ; v1(-60.96,94.488) -60.198,93.726 -52.578,93.726 ; v1(-60.96,99.06) -59.817,100.203 -58.461,100.203 -59.147,100.889 -60.09,100.889 ; -60.198,100.838 -61.925,102.565 -61.925,108.876 -60.565,110.236 ; U7.3 -58.176,112.625 -60.565,110.236 ; IC5.4 -51.669,65.171 -51.669,75.037 -52.578,75.946 -52.578,88.043 -52.375,88.246 -52.375,89.046 -52.578,89.249 -52.578,93.726 ; v1(-49.784,93.726) -52.578,93.726 ; v1(-27.178,95.25) -16.18,84.252 -12.411,84.252 -11.979,83.82
  Bottom Layer w0.254: v1(-81.534,100.076) -80.772,99.314 -80.772,95.155 IC6.4 IC6.4@-78.232,92.71 ; v1(-60.96,94.488) v1(-60.96,99.06) ; v1(-49.784,93.726) -48.26,95.25 v1(-27.178,95.25)
x0: IC3.25 U6.16 | length 31.1
  Top Layer w0.254: U6.16 -32.249,136.906 -31.633,136.29 -31.633,135.763 -29.083,133.213 -29.083,115.258 -32.144,112.197 -32.144,109.588 IC3.25@-32.258,109.474
x1: IC3.26 U6.15 | length 29
  Top Layer w0.254: U6.15 -32.004,134.366 -29.54,131.902 -29.54,115.447 -32.944,112.044 IC3.26
x2: IC3.27 U6.13 | length 23.3
  Top Layer w0.254: IC3.27@-33.782,109.474 -33.744,109.512 -33.744,111.89 -29.997,115.637 -29.997,126.507 -31.633,128.143 -31.633,128.67 -32.249,129.286 U6.13
pads on no net: IC3.10 IC3.11 IC4.5 IC4.6 IC4.7 IC5.5 IC5.6 IC5.7 IC6.5 IC6.6 IC6.7 J1.6 J3.2 J3.3 J3.6 U6.1 U6.14 V4220.2

## Keep-outs
Keep-Out Layer:
  rectangle: -140.695,-46.21 -135.695,153.79
  rectangle: -135.695,-46.21 154.305,-41.21
  rectangle: 149.305,-41.21 154.305,153.79
  rectangle: -135.695,148.79 149.305,153.79

## Text inside footprints (layer, text, board x,y; h text height)
Pile: Top Overlay "wires" at -73.914,137.668 h1 r180